# Altium PCB Audio_testboard.PcbDoc (part 6 of 6)
Units mm, origin at the board's own origin, x right, y up, seen from the top; angles counter-clockwise.
Board outline 220.73 x 144.32 mm, 4 copper layers (Top Layer, Mid-Layer 1, Mid-Layer 2, Bottom Layer), stack 1.894 mm thick; 462 components, 310 nets, 1757 pads, 740 vias.
Unrouted connection lines stored in the file: 5.
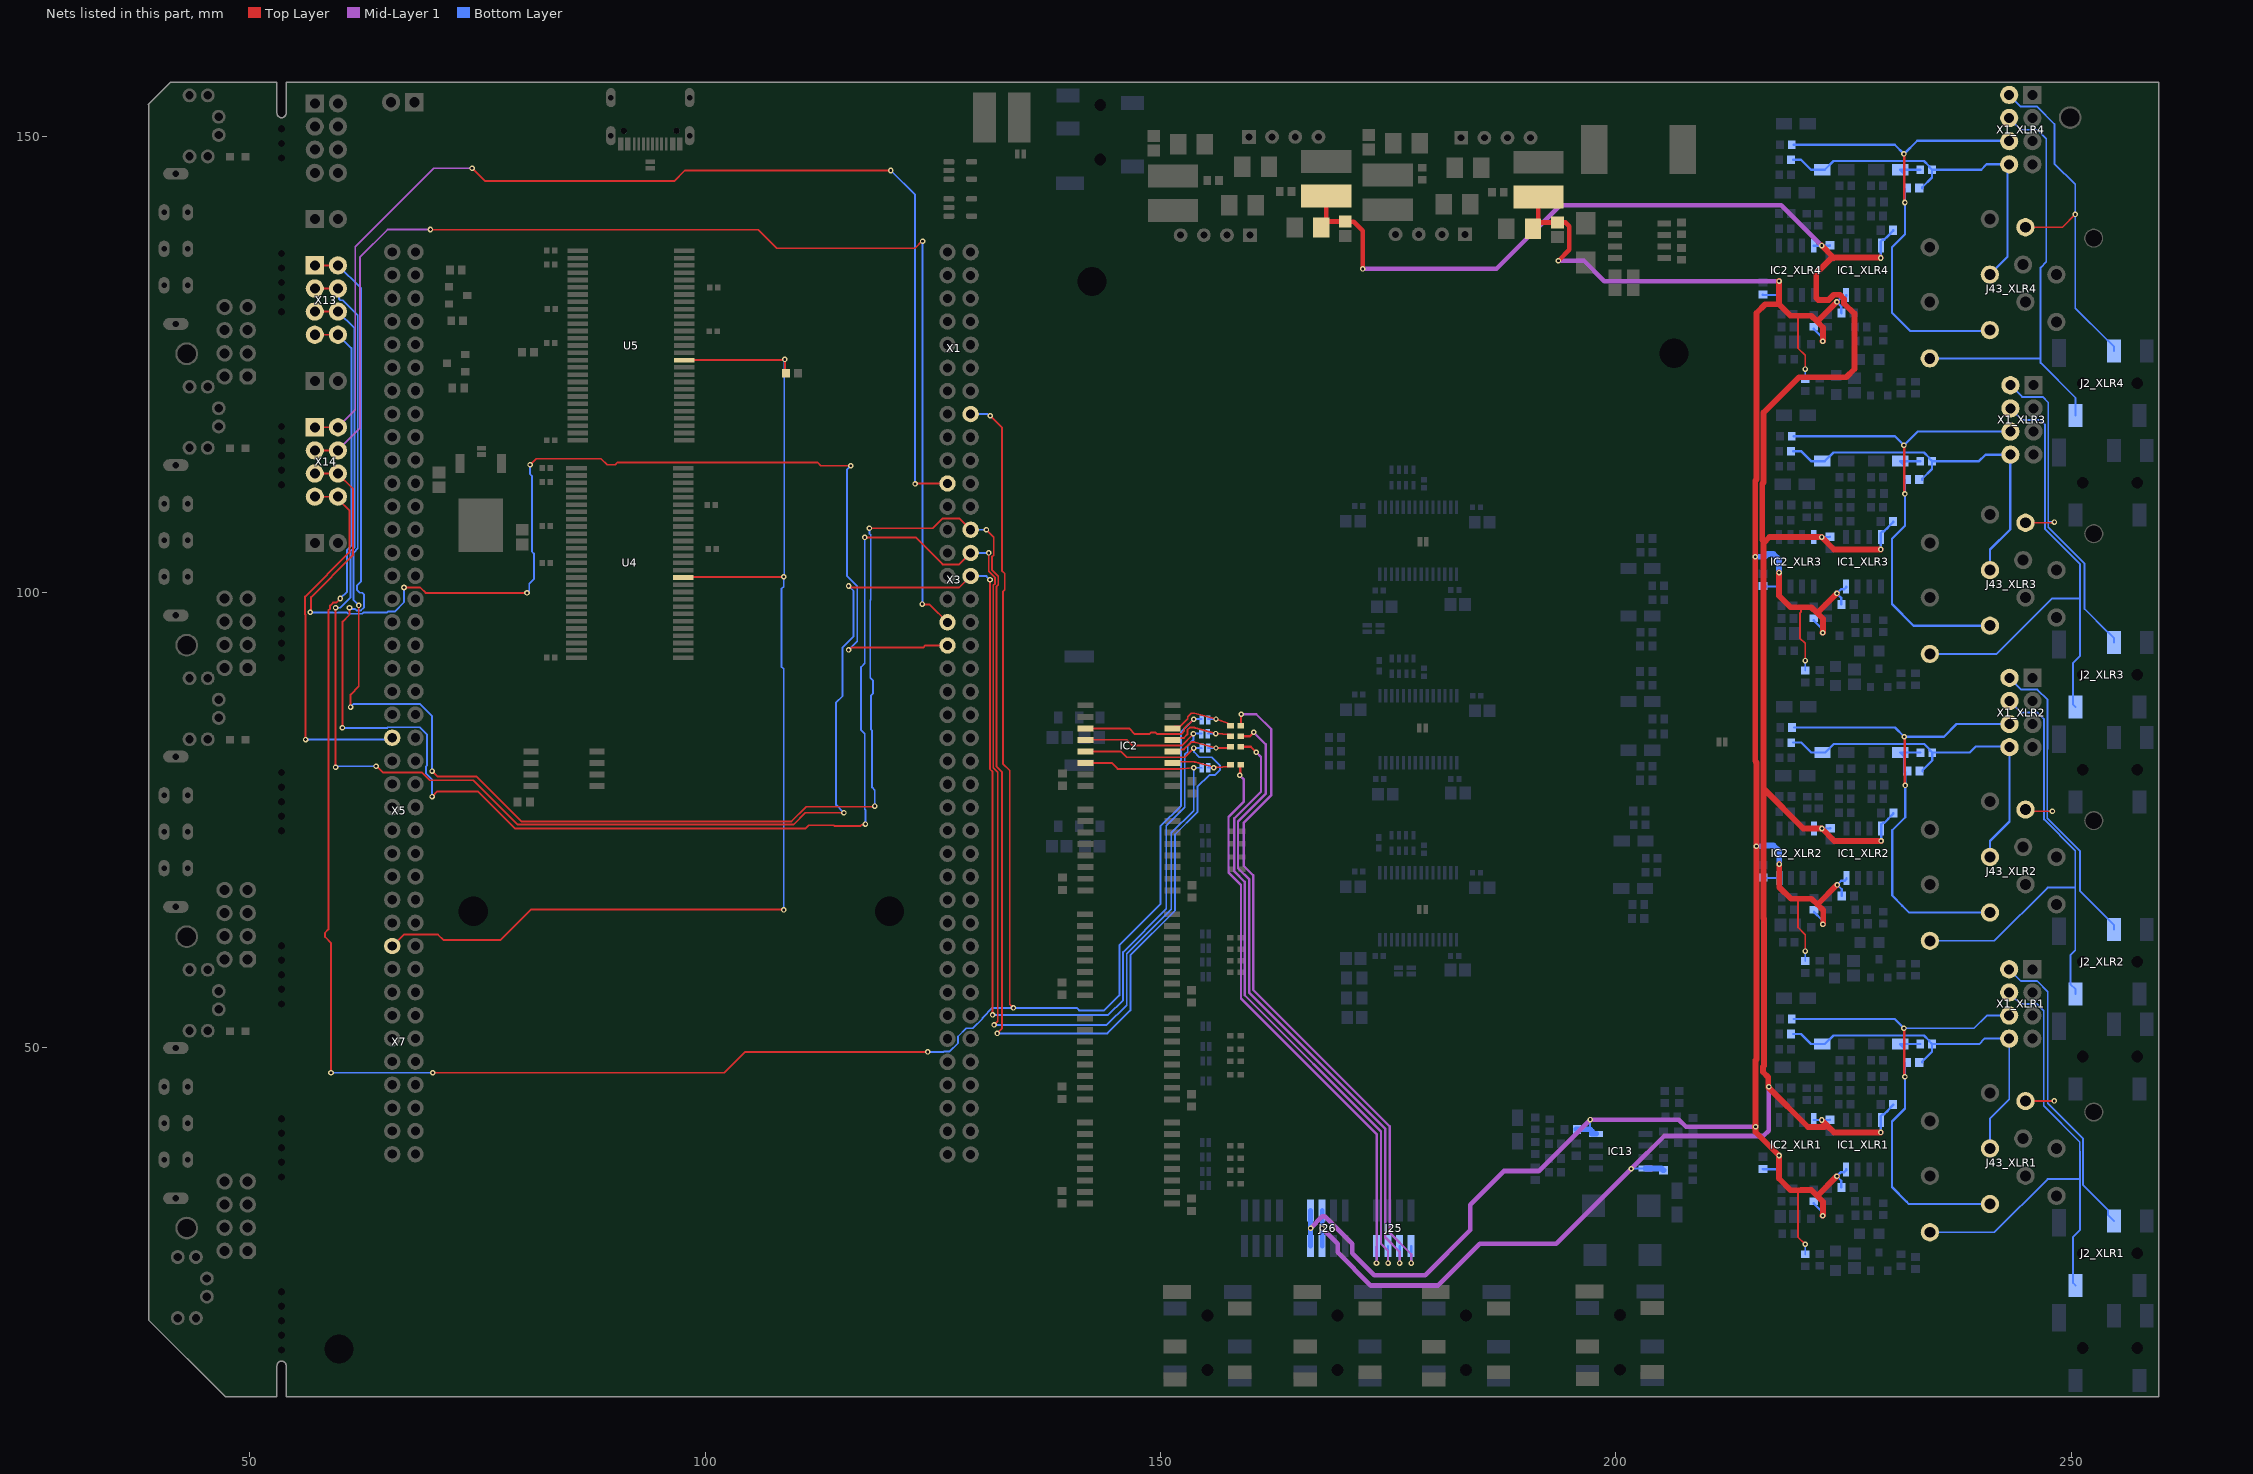
[diagram p7: the nets of this part, all layers, seen from the top]

## Via types
v1: diameter 0.61, hole 0.305, Top Layer to Bottom Layer, 321 vias
v2: diameter 0.6, hole 0.3, Top Layer to Bottom Layer, tented both sides, 219 vias
v3: diameter 0.61, hole 0.305, Top Layer to Bottom Layer, tented both sides, 190 vias
v4: diameter 1.27, hole 0.711, Top Layer to Bottom Layer, 8 vias
v5: diameter 0.6, hole 0.3, Top Layer to Bottom Layer, 2 vias

## Nets (pads, with @x,y where several pads share a name; then routed paths per layer and width w, separated by ;. In a path a pad name is that pad's centre, name@x,y a point inside that pad or via, vN(x,y) a via of type N, cw(c..) or ccw(c..) an arc to the next point about the centre after c; other vN are vias at no path point) (continued)
SPI2_MISO: IC2.6 J22.1 X3.8 X13.1 X13.2 | length 281.1
  Top Layer w0.203: X13.1@57.15,135.89 X13.2@59.69,135.89 ; v1(60.188,85.122) 60.198,85.132 60.198,96.774 60.96,97.536 v1(60.96,98.298) ; v3(70.034,77.567) 70.593,78.126 75.063,78.126 79.137,74.052 111.001,74.052 111.366,74.417 114.146,74.417 114.247,74.316 117.027,74.316 117.175,74.463 117.534,74.463 v3(117.612,74.541) ; v3(117.532,106.015) 123.12,106.015 126.075,103.06 127.904,103.06 X3.8@129.16,104.316 ; v1(131.142,104.316) 131.142,102.312 131.842,101.612 131.842,100.946 131.639,100.742 131.639,80.728 132.131,80.236 132.131,52.883 v1(131.736,52.488) ; IC2.6@141.786,81.242 141.805,81.261 144.636,81.261 145.298,80.599 150.332,80.599 150.335,80.602 152.088,80.602 152.105,80.602 v2(153.65,80.729)
  Bottom Layer w0.203: X13.2@59.69,135.89 62.23,133.35 62.23,101.195 61.767,100.732 61.767,100.269 62.094,99.942 62.364,99.942 62.535,99.771 62.535,98.321 62.207,97.993 61.745,97.993 61.592,98.146 61.112,98.146 v1(60.96,98.298) ; v1(60.188,85.122) 60.22,85.09 65.097,85.09 65.182,85.175 68.678,85.175 69.456,84.397 69.456,80.961 69.374,80.879 69.374,80.087 70.034,79.427 v3(70.034,77.567) ; v3(117.532,106.015) 117.532,92.197 117.126,91.791 117.126,84.851 117.532,84.445 117.532,76.195 117.612,76.116 v3(117.612,74.541) ; X3.8@129.16,104.316 v1(131.142,104.316) ; v1(131.736,52.488) 144.108,52.488 146.297,54.677 146.297,60.319 151.189,65.212 151.189,73.57 153.65,76.031 v2(153.65,80.729) ; v2@153.655,80.734 153.66,80.729 154.52,80.729 J22.1@154.525,80.734
SPI2_MISO_: J25.7 R20.2 | length 64.2
  Top Layer w0.254: v1(158.718,79.915) 158.77,79.968 158.77,80.996 R20.2@158.823,81.049
  Mid-Layer 1 w0.254: v1(158.718,79.915) 159.131,79.502 159.131,76.962 157.48,75.311 157.48,69.215 158.852,67.843 158.852,55.397 173.736,40.513 173.736,26.359 v1(173.719,26.342)
  Bottom Layer w0.254: v1(173.719,26.342) J25.7@173.719,28.212
SPI2_MISO_i: IC2.11 J22.2 R20.1 | length 7.3
  Top Layer w0.203: IC2.11@151.336,81.242 152.109,81.385 153.65,81.385 cw(c153.65,80.729) 153.825,81.361 v2@155.878,80.791 ; v2(155.864,80.739) 155.878,80.753 v2@155.878,80.791 ; R20.1@157.748,81.049 157.6,80.851 156.1,80.739 156.092,80.739 cw(c156.092,80.942) 156.038,80.746 v2@155.878,80.791
  Bottom Layer w0.203: J22.2@155.225,80.734 155.23,80.739 v2(155.864,80.739)
SPI2_MOSI: IC2.5 J21.1 X3.6 X13.3 X13.4 | length 283.3
  Top Layer w0.203: X13.3@57.15,133.35 X13.4@59.69,133.35 ; v1(61.078,87.384) 61.078,88.764 61.976,89.662 v1(61.976,98.552) ; v3(70.034,80.361) 70.63,79.765 74.921,79.765 79.842,74.844 109.491,74.844 111.096,76.449 118.565,76.449 v3(118.635,76.52) ; v3(118.04,107.031) 125.019,107.031 126.1,108.111 127.904,108.111 X3.6@129.16,106.856 ; v1(130.888,106.856) 131.701,106.043 131.701,104.084 131.498,103.881 131.498,102.459 132.198,101.759 132.198,100.798 131.994,100.595 131.994,80.876 132.588,80.282 132.588,52.07 v1(132.08,51.562) ; IC2.5@141.786,82.512 141.805,82.531 145.652,82.531 146.301,81.882 152.644,81.882 v2(153.65,82.888)
  Bottom Layer w0.203: X13.4@59.69,133.35 59.824,133.216 59.824,132.2 59.96,132.064 60.209,132.064 61.874,130.399 61.874,104.815 61.411,104.352 61.411,99.117 v1(61.976,98.552) ; v1(61.078,87.384) 61.434,87.74 68.653,87.74 70.034,86.359 v3(70.034,80.361) ; v3(118.04,107.031) 118.04,106.441 118.192,106.289 118.192,99.182 118.142,99.132 118.142,90.609 118.446,90.305 118.446,88.888 118.231,88.673 118.231,84.895 118.345,84.781 118.345,78.563 118.635,78.273 v3(118.635,76.52) ; X3.6@129.16,106.856 v1(130.888,106.856) ; v1(132.08,51.562) 144.182,51.562 146.703,54.083 146.703,60.151 151.596,65.043 151.596,73.402 154.056,75.863 154.056,78.635 155.351,79.929 155.981,79.929 156.52,80.467 156.52,81.011 155.646,81.884 154.271,81.884 153.683,82.472 153.683,82.855 v2(153.65,82.888) ; v2@153.655,82.893 153.66,82.888 154.52,82.888 J21.1@154.525,82.893
SPI2_MOSI_: J25.5 R19.2 | length 68.3
  Top Layer w0.254: R19.2@158.823,83.039 159.912,83.039 v1(160.528,82.423)
  Mid-Layer 1 w0.254: v1(160.528,82.423) 161.036,81.915 161.036,78.105 158.115,75.184 158.115,69.342 159.258,68.199 159.258,55.753 174.219,40.792 174.219,28.473 174.989,27.703 v1(174.989,26.342)
  Bottom Layer w0.254: v1(174.989,26.342) J25.5@174.989,28.212
SPI2_MOSI_i: IC2.12 J21.2 R19.1 | length 6.8
  Top Layer w0.203: 152.292,82.747 152.582,82.747 153.374,83.539 153.57,83.539 cw(c153.65,82.888) 153.825,83.52 156.046,82.905 ccw(c156.1,83.101) v2(156.1,82.898) 157.6,82.898 R19.1@157.748,83.039
  Bottom Layer w0.203: J21.2@155.225,82.893 v2@156.095,82.893
SPI2_NSS: IC2.3 J20.1 X1.16 X13.7 X13.8 | length 293
  Top Layer w0.203: X13.7@57.15,128.27 X13.8@59.69,128.27 ; v1(58.928,47.244) 58.928,61.5 58.273,62.155 58.273,62.618 58.643,62.988 58.643,98.013 58.826,98.196 58.826,98.529 59.154,98.857 59.487,98.857 v1(59.944,99.314) ; v1(70.104,47.244) 102.108,47.244 104.394,49.53 v1(124.46,49.53) ; v1(131.318,119.38) 132.588,118.11 132.588,102.375 132.909,102.054 132.909,100.278 132.706,100.074 132.706,81.17 133.452,80.424 133.452,54.762 v1(133.858,54.356) ; IC2.3@141.786,85.052 146.56,85.052 147.19,84.422 148.785,84.422 148.977,84.614 149.439,84.614 149.631,84.422 152.265,84.422 152.61,84.767 152.61,85.041 153.632,86.063 v2(153.65,86.063)
  Bottom Layer w0.203: v1(58.928,47.244) 58.981,47.297 59.129,47.297 59.182,47.244 v1(70.104,47.244) ; X13.8@59.69,128.27 61.163,126.797 61.163,105.11 60.7,104.647 60.7,100.07 v1(59.944,99.314) ; v1(124.46,49.53) 126.178,49.53 126.238,49.59 126.866,49.59 127.774,50.498 127.774,51.222 128.682,52.13 129.406,52.13 130.475,53.199 130.475,53.287 131.544,54.356 v1(133.858,54.356) 140.788,54.356 141.062,54.081 143.825,54.081 145.484,55.74 145.484,61.243 149.991,65.749 149.991,74.283 152.266,76.558 152.266,84.679 v2(153.65,86.063) ; X1.16@129.25,119.466 X1.16@129.16,119.556 131.032,119.556 131.208,119.38 v1(131.318,119.38) ; v2@153.655,86.068 J20.1@154.525,86.068
SPI2_NSS_: J25.1 R10.2 | length 74.6
  Top Layer w0.254: R10.2@158.823,85.349 158.85,85.376 158.85,86.587 v1(158.877,86.614)
  Mid-Layer 1 w0.254: v1(158.877,86.614) 160.528,86.614 162.179,84.963 162.179,77.724 159.131,74.676 159.131,69.977 160.172,68.936 160.172,56.363 175.158,41.377 175.158,29.693 177.529,27.322 v1(177.529,26.342)
  Bottom Layer w0.254: v1(177.529,26.342) J25.1@177.529,28.212
SPI2_NSS_i: IC2.14 J20.2 R10.1 | length 8.4
  Top Layer w0.203: IC2.14@151.336,85.052 151.559,85.275 152.164,85.275 152.994,86.106 152.994,86.335 153.378,86.719 153.738,86.719 v2(156.1,86.073) 157.6,85.547 R10.1@157.748,85.349
  Bottom Layer w0.203: J20.2@155.225,86.068 156.095,86.068 v2(156.1,86.073)
SPI2_SCK: IC2.4 J23.1 X3.10 X13.5 X13.6 | length 264.7
  Top Layer w0.203: X13.5@57.15,130.81 X13.6@59.69,130.81 ; v1(59.436,80.772) v1(59.436,98.298) ; v1(63.875,80.898) 63.975,80.898 64.677,80.196 68.929,80.196 69.767,79.358 74.566,79.358 79.435,74.489 109.71,74.489 111.01,75.789 v3(115.246,75.789) ; 116.025,100.52 127.904,100.52 X3.10@129.16,101.776 ; v1(131.283,101.381) 131.283,80.581 131.572,80.292 v1(131.572,53.594) ; IC2.4@141.786,83.782 141.805,83.801 146.287,83.801 146.936,83.152 152.253,83.152 152.254,83.153 152.338,83.153 153.621,84.436 v2(153.621,84.476)
  Bottom Layer w0.203: v1(59.436,80.772) 59.514,80.85 59.695,80.85 59.743,80.898 v1(63.875,80.898) ; v1(59.436,98.298) 59.944,98.298 61.056,99.41 61.056,104.5 61.519,104.962 61.519,128.981 X13.6@59.69,130.81 ; v3(115.246,75.789) 114.382,76.653 114.382,87.895 115.094,88.607 115.094,93.944 116.303,95.153 116.303,100.132 v3(115.754,100.681) ; X3.10@129.16,101.776 130.888,101.776 v1(131.283,101.381) v1@131.318,101.346 ; v1(131.572,53.594) 144.272,53.594 145.891,55.213 145.891,60.488 150.632,65.23 150.632,74.35 152.672,76.39 152.672,82.202 152.689,82.202 152.994,82.507 152.994,83.16 153.621,83.786 v2(153.621,84.476) ; v2@153.626,84.481 J23.1@154.496,84.481
SPI2_SCK_: J25.3 R14.2 | length 70.9
  Top Layer w0.254: R14.2@158.823,84.194 159.822,84.194 v1(160.242,84.614)
  Mid-Layer 1 w0.254: v1(160.242,84.614) 161.544,83.312 161.544,77.851 158.521,74.828 158.521,69.698 159.766,68.453 159.766,56.007 174.694,41.079 174.694,29.141 176.259,27.576 v1(176.259,26.342)
  Bottom Layer w0.254: v1(176.259,26.342) J25.3@176.259,28.212
SPI2_SCK_i: IC2.13 J23.2 R14.1 | length 8.4
  Top Layer w0.203: IC2.13@151.336,83.782 151.559,84.005 152.585,84.005 152.965,84.385 152.965,84.893 153.216,85.144 153.759,85.144 153.762,85.141 153.795,85.108 153.84,85.096 156.029,84.493 ccw(c156.083,84.689) v2(156.071,84.486) 157.6,84.392 R14.1@157.748,84.194
  Bottom Layer w0.203: J23.2@155.196,84.481 156.066,84.481 v2(156.071,84.486)
TRS_RING_XLR1: J2_XLR1.5 J43_XLR1.5 X1_XLR1.2 | length 37.3
  Top Layer w0.203: J43_XLR1.5@244.976,44.126 248.1,44.126 v1(248.126,44.153)
  Bottom Layer w0.203: X1_XLR1.2@243.189,58.603 244.475,57.317 246.248,57.317 247.426,56.14 247.426,44.196 ; v1(248.126,44.153) 247.469,44.153 247.426,44.196 ; J2_XLR1.5@254.684,30.982 254.024,31.642 254.024,32.181 251.308,34.897 251.308,39.993 247.426,43.875 247.426,44.196
TRS_RING_XLR2: J2_XLR2.5 J43_XLR2.5 X1_XLR2.2 | length 37.2
  Top Layer w0.203: J43_XLR2.5@244.976,76.13 245.16,75.946 v1(247.929,75.946) v1@248.158,75.946
  Bottom Layer w0.203: X1_XLR2.2@243.221,90.603 244.507,89.317 246.28,89.317 247.396,88.201 247.396,82.804 247.371,82.779 247.371,75.946 ; v1(247.929,75.946) 247.371,75.946 ; J2_XLR2.5@254.684,62.986 254.684,63.494 254.024,64.154 254.016,64.154 250.952,67.219 250.952,71.623 247.371,75.204 247.371,75.946
TRS_RING_XLR3: J2_XLR3.5 J43_XLR3.5 X1_XLR3.2 | length 38.2
  Top Layer w0.203: J43_XLR3.5@244.976,107.626 248.088,107.626 v1(248.158,107.696)
  Bottom Layer w0.203: X1_XLR3.2@243.316,122.726 244.602,121.44 246.86,121.44 247.47,120.83 247.47,107.696 ; v1(248.158,107.696) 247.47,107.696 ; J2_XLR3.5@254.684,94.482 254.684,94.99 254.024,95.65 253.97,95.65 251.46,98.16 251.46,103.124 247.47,107.114 247.47,107.696
TRS_RING_XLR4: J2_XLR4.5 J43_XLR4.5 X1_XLR4.2 | length 40
  Top Layer w0.203: J43_XLR4.5@244.961,140.074 249.04,140.074 v1(250.444,141.478)
  Bottom Layer w0.203: X1_XLR4.2@243.189,154.603 244.475,153.317 246.248,153.317 248.158,151.407 248.158,147.066 250.444,144.78 v1(250.444,141.478) 250.444,131.189 253.979,127.654 254.024,127.654 254.684,126.994 J2_XLR4.5@254.684,126.486
TRS_TIP_XLR1: J2_XLR1.2 J43_XLR1.6 X1_XLR1.4 | length 55.8
  Bottom Layer w0.203: J43_XLR1.6@234.476,29.726 241.562,29.726 247.396,35.56 250.952,35.56 ; X1_XLR1.4@243.189,56.063 244.475,54.777 246.248,54.777 246.983,54.042 246.983,43.593 250.938,39.638 250.938,38.627 250.952,38.613 250.952,35.56 ; J2_XLR1.2@250.484,23.882 250.208,24.158 250.208,29.228 250.952,29.972 250.952,35.56
TRS_TIP_XLR2: J2_XLR2.2 J43_XLR2.6 X1_XLR2.4 | length 55.1
  Bottom Layer w0.203: J43_XLR2.6@234.476,61.73 241.562,61.73 247.396,67.564 250.444,67.564 ; X1_XLR2.4@243.221,88.063 244.507,86.777 246.28,86.777 247.015,86.042 247.015,75.057 250.444,71.628 250.444,67.564 ; J2_XLR2.2@250.484,55.886 250.484,56.394 249.904,56.974 249.904,60.166 250.444,60.706 250.444,67.564
TRS_TIP_XLR3: J2_XLR3.2 J43_XLR3.6 X1_XLR3.4 | length 56.6
  Bottom Layer w0.203: J43_XLR3.6@234.476,93.226 241.816,93.226 247.904,99.314 250.952,99.314 ; X1_XLR3.4@243.316,120.186 244.602,118.9 246.658,118.9 247.114,118.444 247.114,106.962 250.952,103.124 250.952,99.314 ; J2_XLR3.2@250.484,87.382 250.19,87.676 250.19,92.202 250.952,92.964 250.952,99.314
TRS_TIP_XLR4: J2_XLR4.2 J43_XLR4.6 X1_XLR4.4 | length 49.5
  Bottom Layer w0.203: J43_XLR4.6@234.461,125.674 246.578,125.674 246.634,125.73 ; X1_XLR4.4@243.189,152.063 244.475,150.777 246.248,150.777 247.259,149.766 247.259,136.261 246.634,135.636 246.634,125.73 ; J2_XLR4.2@250.484,119.386 250.484,121.325 246.634,125.175 246.634,125.73
"UART1 RX": X3.13 X14.3 X14.4 | length 132.4
  Top Layer w0.203: X14.3@57.15,115.57 X14.4@59.69,115.57 ; v1@69.85,139.797 105.848,139.797 107.88,137.765 123.052,137.765 123.814,138.527 v3(123.882,138.527) ; v3(123.837,98.694) 123.882,98.649 124.667,98.649 X3.13@126.62,96.696
  Mid-Layer 1 w0.203: X14.4@59.69,115.57 62.103,117.983 62.103,136.779 65.151,139.827 v1(69.85,139.827)
  Bottom Layer w0.203: v3(123.837,98.694) 123.86,98.716 123.86,138.505 v3(123.882,138.527)
UART1_TX: X3.1 X14.1 X14.2 | length 125.7
  Top Layer w0.203: X14.1@57.15,118.11 X14.2@59.69,118.11 ; v1(74.422,146.558) 75.819,145.161 89.027,145.161 89.052,145.136 96.622,145.136 97.79,146.304 v1(120.396,146.304) ; v1@123.112,111.936 X3.1@126.62,111.936
  Mid-Layer 1 w0.203: X14.2@59.69,118.11 61.595,120.015 61.595,137.922 70.231,146.558 v1(74.422,146.558) ; v1(123.063,111.887) v1@123.112,111.936
  Bottom Layer w0.203: v1(120.396,146.304) 123.063,143.637 v1(123.063,111.887)
UART2_RX: X5.3 X14.7 X14.8 | length 41.4
  Top Layer w0.203: v1(56.134,83.82) 56.134,97.508 56.083,97.559 56.083,99.517 60.944,104.378 60.944,108.982 59.69,110.236 X14.8@59.69,110.49 X14.7@57.15,110.49
  Bottom Layer w0.203: v1(56.134,83.82) 65.459,83.82 X5.3@65.66,84.021
UART2_TX: X3.15 X14.5 X14.6 | length 129.5
  Top Layer w0.203: v1@56.744,97.79 56.744,99.459 61.332,104.048 61.332,111.388 X14.6@59.69,113.03 X14.5@57.15,113.03 ; v1(66.944,100.516) 68.72,100.516 69.318,99.919 v3(80.448,99.919) ; v3(80.789,113.991) 80.804,113.991 81.464,114.651 88.576,114.651 89.236,113.991 90.12,113.991 90.374,114.245 112.35,114.245 112.706,113.889 v3(116.008,113.889) ; v3(115.754,93.671) 115.822,93.671 116.076,93.925 123.968,93.925 124.2,94.156 X3.15@126.62,94.156
  Bottom Layer w0.203: v1(56.642,97.79) 59.103,97.79 59.154,97.739 59.667,97.739 59.718,97.79 60.678,97.79 60.83,97.638 62.355,97.638 62.507,97.79 65.097,97.79 65.182,97.875 65.906,97.875 66.944,98.913 v1(66.944,100.516) ; v3(80.448,99.919) 80.448,99.987 80.702,100.241 80.702,100.935 81.21,101.443 81.21,104.237 80.999,104.448 80.999,112.747 80.789,112.958 v3(80.789,113.991) ; v3(115.754,93.671) 116.709,94.626 116.709,100.66 115.602,101.767 115.602,113.483 v3(116.008,113.889)
UDQM: R44.2 U4.39 U5.39 X7.1 | length 129.6
  Top Layer w0.203: X7.1@65.66,61.161 66.916,62.416 70.68,62.416 71.27,61.826 77.574,61.826 80.929,65.181 108.582,65.181 v3(108.642,65.121) ; U4.39@97.601,101.621 97.639,101.659 108.604,101.659 v3(108.642,101.697) ; U5.39@97.72,125.483 108.685,125.483 v3(108.761,125.559) 108.761,124.184 R44.2@108.896,124.049
  Bottom Layer w0.203: v3(108.642,65.121) 108.642,91.576 108.388,91.83 108.388,100.361 108.642,100.615 v3(108.642,101.697) 108.701,101.756 108.701,125.499 v3(108.761,125.559)
VCC+: C8_XLR1.1 C8_XLR2.1 C8_XLR3.1 C8_XLR4.1 C9_XLR1.1 C9_XLR2.1 C9_XLR3.1 C9_XLR4.1 C75.1 C76.2 C89.1 IC1_XLR1.8 IC1_XLR2.8 IC1_XLR3.8 IC1_XLR4.8 IC2_XLR1.8 IC2_XLR2.8 IC2_XLR3.8 IC2_XLR4.8 IC13.8 J26.7 J26.8 L4.1 R17_XLR1.1 R17_XLR2.1 R17_XLR3.1 R17_XLR4.1 R63_XLR1.2 R63_XLR2.2 R63_XLR3.2 R63_XLR4.2 | length 324.2
  Top Layer w0.203: 220,34.346 220,29.2 v1(220.8,28.4) ; 220,66.346 220,63.206 220.8,62.406 v1(220.8,60.6) ; 220,130.346 220,126.8 220.8,126 v1(220.8,124.5) ; 220.318,98.346 220.318,97.815 220.215,97.712 220.215,94.959 220.8,94.374 v1(220.8,92.5)
  Top Layer w0.508: C75.1@190.9,139.9 190.9,139.954 C75.1@191.5,140.554 ; L4.1@191.5,143.39 C75.1@191.5,140.554 ; v1(193.7,136.4) 194.9,137.6 194.9,140.2 194.513,140.587 193.613,140.587 C76.2@193.6,140.6 191.546,140.6 C75.1@191.5,140.554
  Top Layer w0.635: v1(217.916,102.156) 217.916,99.616 219.186,98.346 220.318,98.346 220.329,98.357 221.461,98.357 222.102,97.716 ; v1(217.916,134.156) 217.916,131.616 ; v1(217.948,70.156) 217.948,67.616 219.218,66.346 220,66.346 220.35,66.346 220.361,66.357 221.493,66.357 222.134,65.716 ; v1(222.704,31.551) 222.742,31.588 222.742,33.076 222.102,33.716 ; v1(222.704,95.551) 222.742,95.588 222.742,97.076 222.102,97.716 ; v1(222.704,127.551) 222.742,127.588 222.742,129.076 222.102,129.716 ; v1(222.736,63.551) 222.774,63.588 222.774,65.076 222.134,65.716 ; v1(224.266,35.87) 224.255,35.87 222.102,33.716 ; v1(224.266,99.87) 224.255,99.87 222.102,97.716 ; v1(224.266,131.87) 224.255,131.87 222.102,129.716 ; v1(224.298,67.87) 224.287,67.87 222.134,65.716 ; 217.916,131.616 216.392,131.616 215.438,130.662 215.438,112.383 215.297,112.242 v1(215.297,103.9) 215.297,81.455 215.438,81.313 v1(215.438,72.1) 215.438,48.701 215.34,48.602 215.34,40.732 v1(217.916,38.156) 217.916,35.616 219.186,34.346 220,34.346 220.318,34.346 220.329,34.357 221.461,34.357 222.102,33.716 ; 217.916,131.616 219.186,130.346 220,130.346 220.318,130.346 220.329,130.357 221.461,130.357 222.102,129.716
  Mid-Layer 1 w0.508: v1(166.48,30.162) 167.782,31.464 168.053,31.464 171.069,28.448 171.069,27.432 173.482,25.019 179.07,25.019 184.023,29.972 184.023,32.766 187.706,36.449 191.549,36.449 v1(197.2,42.1) 206.9,42.1 207.7,41.3 215.325,41.3 v1(215.34,41.315) ; v1(193.7,136.4) 196.5,136.4 198.744,134.156 v1(217.916,134.156)
  Bottom Layer w0.203: R63_XLR1.2@220.8,27.3 v1(220.8,28.4) ; R63_XLR2.2@220.8,59.5 v1(220.8,60.6) ; R63_XLR3.2@220.8,91.4 v1(220.8,92.5) ; R63_XLR4.2@220.8,123.4 v1(220.8,124.5)
  Bottom Layer w0.254: 197.162,41.027 197.162,42.062 v1(197.2,42.1) ; C9_XLR1.1@216.138,36.677 216.183,36.632 IC2_XLR1.8@217.916,36.632 v1(217.916,38.156) ; C9_XLR3.1@216.138,100.677 216.183,100.632 IC2_XLR3.8@217.916,100.632 v1(217.916,102.156) ; C9_XLR4.1@216.138,132.677 216.183,132.632 IC2_XLR4.8@217.916,132.632 v1(217.916,134.156) ; C9_XLR2.1@216.17,68.677 216.215,68.632 IC2_XLR2.8@217.948,68.632 v1(217.948,70.156) ; R17_XLR1.1@221.726,32.945 221.726,32.895 222.636,31.985 222.636,31.619 v1(222.704,31.551) ; R17_XLR3.1@221.726,96.945 221.726,96.895 222.636,95.985 222.636,95.619 v1(222.704,95.551) ; R17_XLR4.1@221.726,128.945 221.726,128.895 222.636,127.985 222.636,127.619 v1(222.704,127.551) ; R17_XLR2.1@221.758,64.945 221.758,64.895 222.668,63.985 222.668,63.619 v1(222.736,63.551) ; C8_XLR1.1@224.774,34.645 224.759,34.66 224.759,35.377 v1(224.266,35.87) 224.725,36.329 225.084,36.329 225.282,36.527 IC1_XLR1.8@225.282,36.632 ; C8_XLR3.1@224.774,98.645 224.759,98.66 224.759,99.377 v1(224.266,99.87) 224.725,100.329 225.084,100.329 225.282,100.527 IC1_XLR3.8@225.282,100.632 ; C8_XLR4.1@224.774,130.645 224.759,130.66 224.759,131.377 v1(224.266,131.87) 224.725,132.329 225.084,132.329 225.282,132.527 IC1_XLR4.8@225.282,132.632 ; C8_XLR2.1@224.806,66.645 224.791,66.66 224.791,67.377 v1(224.298,67.87) 224.757,68.329 225.116,68.329 225.314,68.527 IC1_XLR2.8@225.314,68.632
  Bottom Layer w0.508: J26.7@166.48,28.212 v1(166.48,30.162) J26.8@166.48,32.112
  Bottom Layer w0.635: C89.1@195.65,41.027 C89.1@195.725,41.027 197.162,41.027 197.393,40.797 197.393,40.54 197.4,40.532 IC13.8@197.838,40.532 ; v1(215.297,103.9) 216.379,103.9 216.68,104.201 217.321,104.201 217.7,103.822 217.7,103.8 217.916,103.584 v1(217.916,102.156) ; v1(215.438,72.1) 216.33,72.1 216.43,72.201 217.321,72.201 217.948,71.575 v1@217.948,70.156
VCC-: C10_XLR1.2 C10_XLR2.2 C10_XLR3.2 C10_XLR4.2 C11_XLR1.2 C11_XLR2.2 C11_XLR3.2 C11_XLR4.2 C78.1 C79.2 C90.2 IC1_XLR1.4 IC1_XLR2.4 IC1_XLR3.4 IC1_XLR4.4 IC2_XLR1.4 IC2_XLR2.4 IC2_XLR3.4 IC2_XLR4.4 IC13.4 J26.5 J26.6 L6.1 | length 315.8
  Top Layer w0.508: C78.1@167.719,140.173 C78.1@168.246,140.7 ; L6.1@168.2,143.49 168.2,140.654 C78.1@168.246,140.7 ; v1(172.2,135.5) 172.2,139.7 171.213,140.687 170.313,140.687 C79.2@170.3,140.7 C78.1@168.246,140.7
  Top Layer w0.635: v1@216.735,45.7 216.735,46.736 216.154,47.317 216.154,47.908 216.254,48.008 216.254,64.162 216.226,64.19 216.226,78.414 ; v1@216.741,45.641 221.101,41.281 222.918,41.281 223.013,41.376 223.278,41.376 ; v1(222.598,42.056) 223.278,41.376 ; v1(222.597,138.056) 223.958,136.696 ; 223.815,136.839 222,135.024 222,132.331 222.231,132.1 223.372,132.1 223.929,132.657 224.592,132.657 225.053,132.196 225.053,131.709 226.162,130.6 226.2,130.6 226.2,124.5 225.3,123.6 220.1,123.6 216.226,119.726 216.226,112.057 216.084,111.916 216.084,105.73 216.226,105.588 216.226,105.41 ; 223.913,136.741 v1@229.047,136.741 ; v1(229.092,40.696) 223.958,40.696 223.278,41.376 ; v1(229.092,104.696) 223.958,104.696 v1(222.597,106.056) 216.872,106.056 216.226,105.41 ; v1(229.124,72.696) 223.99,72.696 v1(222.63,74.056) 220.584,74.056 216.226,78.414 ; 216.226,78.414 216.226,105.41
  Mid-Layer 1 w0.508: v1(167.75,30.162) 169.464,28.448 169.464,27.513 173.101,23.876 180.467,23.876 185.039,28.448 193.448,28.448 v1(201.7,36.7) 205.3,40.3 216.2,40.3 216.796,40.896 v1@216.796,45.696 ; v1(172.2,135.5) 186.9,135.5 193.9,142.5 218.153,142.5 v1(222.597,138.056)
  Bottom Layer w0.254: v1(201.7,36.7) 201.722,36.722 IC13.4@203.262,36.722 ; IC2_XLR1.4@221.726,42.056 v1(222.598,42.056) 223.469,42.056 C11_XLR1.2@223.504,42.091 ; IC2_XLR3.4@221.726,106.056 v1(222.597,106.056) 223.469,106.056 C11_XLR3.2@223.504,106.091 ; IC2_XLR4.4@221.726,138.056 v1(222.597,138.056) 223.469,138.056 C11_XLR4.2@223.504,138.091 ; IC2_XLR2.4@221.758,74.056 v1(222.63,74.056) 223.501,74.056 C11_XLR2.2@223.536,74.091 ; v1(229.092,40.696) 229.092,42.494 229.29,42.692 229.456,42.692 229.872,43.107 229.872,43.124 230.442,43.694 C10_XLR1.2@230.442,43.744 ; v1(229.092,104.696) IC1_XLR3.4@229.092,106.056 229.092,106.494 229.29,106.692 229.456,106.692 229.872,107.107 229.872,107.124 230.442,107.694 C10_XLR3.2@230.442,107.744 ; v1(229.092,136.696) IC1_XLR4.4@229.092,138.056 229.092,138.493 229.29,138.692 229.456,138.692 229.872,139.107 229.872,139.124 230.442,139.694 C10_XLR4.2@230.442,139.744 ; v1(229.124,72.696) IC1_XLR2.4@229.124,74.056 229.124,74.494 229.322,74.692 229.488,74.692 229.904,75.107 229.904,75.124 230.474,75.694 C10_XLR2.2@230.474,75.744
  Bottom Layer w0.508: J26.5@167.75,28.212 v1(167.75,30.162) J26.6@167.75,32.112
  Bottom Layer w0.635: IC13.4@203.262,36.722 205.005,36.722 205.2,36.527 C90.2@205.25,36.527
  other v1: 216.8,45.7
XLR_A_XLR1: C1_XLR1.2 C2_XLR1.2 J43_XLR1.2 R4_XLR1.1 R14_XLR1.1 X1_XLR1.6 | length 60.3
  Top Layer w0.254: v1(231.632,52.126) 231.673,52.085 231.673,46.857 v1(231.738,46.792)
  Bottom Layer w0.203: v1(231.632,52.126) 239.324,52.126 240.721,53.523 X1_XLR1.6@243.189,53.523 ; 231.943,33.061 232.179,32.826 J43_XLR1.2@241.076,32.826
  Bottom Layer w0.254: R14_XLR1.1@219.518,53.142 230.616,53.142 v1(231.632,52.126) ; 231.943,33.061 230.31,34.694 230.31,41.876 231.738,43.304 v1(231.738,46.792) 231.738,48.255 231.632,48.361 231.632,49.965 C1_XLR1.2@231.204,50.393 R4_XLR1.1@233.41,50.393
XLR_A_XLR2: C1_XLR2.2 C2_XLR2.2 J43_XLR2.2 R4_XLR2.1 R14_XLR2.1 X1_XLR2.6 | length 60.3
  Top Layer w0.254: v1(231.664,84.126) 231.705,84.085 231.705,78.857 v1(231.77,78.792)
  Bottom Layer w0.203: 231.449,65.587 232.207,64.83 J43_XLR2.2@241.076,64.83
  Bottom Layer w0.254: R14_XLR2.1@219.55,85.142 230.648,85.142 v1(231.664,84.126) 236.018,84.126 237.415,85.523 X1_XLR2.6@243.221,85.523 ; 231.449,65.587 230.342,66.694 230.342,73.876 231.77,75.304 v1(231.77,78.792) 231.77,80.255 231.664,80.361 231.664,81.965 C1_XLR2.2@231.236,82.393 R4_XLR2.1@233.442,82.393
XLR_A_XLR3: C1_XLR3.2 C2_XLR3.2 J43_XLR3.2 R4_XLR3.1 R14_XLR3.1 X1_XLR3.6 | length 60.7
  Top Layer w0.254: v1(231.632,116.126) 231.673,116.085 231.673,110.857 v1(231.738,110.792)
  Bottom Layer w0.254: R14_XLR3.1@219.518,117.142 230.616,117.142 v1(231.632,116.126) 233.152,117.646 X1_XLR3.6@243.316,117.646 ; R4_XLR3.1@233.41,114.393 C1_XLR3.2@231.204,114.393 231.632,113.965 231.632,112.361 231.738,112.255 v1(231.738,110.792) 231.738,107.304 230.31,105.876 230.31,98.694 232.679,96.326 J43_XLR3.2@241.076,96.326
XLR_A_XLR4: C1_XLR4.2 C2_XLR4.2 J43_XLR4.2 R4_XLR4.1 R14_XLR4.1 X1_XLR4.6 | length 60.4
  Top Layer w0.254: v1(231.632,148.126) 231.673,148.085 231.673,142.857 v1(231.738,142.792)
  Bottom Layer w0.254: R14_XLR4.1@219.518,149.142 230.616,149.142 v1(231.632,148.126) 233.081,149.575 243.137,149.575 X1_XLR4.6@243.189,149.523 ; R4_XLR4.1@233.41,146.393 C1_XLR4.2@231.204,146.393 231.632,145.965 231.632,144.361 231.738,144.255 v1(231.738,142.792) 231.738,139.304 230.31,137.876 230.31,130.694 232.32,128.685 240.972,128.685 J43_XLR4.2@241.061,128.774
XLR_B_XLR1: C2_XLR1.1 C7_XLR1.2 J43_XLR1.3 R4_XLR1.2 R15_XLR1.1 X1_XLR1.8 | length 40.7
  Bottom Layer w0.203: R4_XLR1.2@234.71,50.393 239.877,50.393 240.467,50.983 X1_XLR1.8@243.189,50.983 243.189,44.307 241.076,42.194 J43_XLR1.3@241.076,38.926
  Bottom Layer w0.254: R15_XLR1.1@219.44,51.491 220.329,51.491 221.427,50.393 C7_XLR1.2@222.662,50.393 222.947,50.393 223.892,51.338 233.832,51.338 234.412,50.758 234.412,50.691 R4_XLR1.2@234.71,50.393 234.71,49.539 233.632,48.461 C2_XLR1.1@233.632,48.361
XLR_B_XLR2: C2_XLR2.1 C7_XLR2.2 J43_XLR2.3 R4_XLR2.2 R15_XLR2.1 X1_XLR2.8 | length 40.8
  Bottom Layer w0.254: R15_XLR2.1@219.472,83.491 220.361,83.491 221.459,82.393 C7_XLR2.2@222.694,82.393 222.979,82.393 223.924,83.338 233.864,83.338 234.444,82.758 234.444,82.691 R4_XLR2.2@234.742,82.393 ; C2_XLR2.1@233.664,80.361 233.664,80.461 234.742,81.539 R4_XLR2.2@234.742,82.393 ; J43_XLR2.3@241.076,70.93 241.076,72.674 243.221,74.819 X1_XLR2.8@243.221,82.983 243.146,83.058 239.522,83.058 238.857,82.393 R4_XLR2.2@234.742,82.393
XLR_B_XLR3: C2_XLR3.1 C7_XLR3.2 J43_XLR3.3 R4_XLR3.2 R15_XLR3.1 X1_XLR3.8 | length 41.5
  Bottom Layer w0.254: R15_XLR3.1@219.44,115.491 220.329,115.491 221.427,114.393 C7_XLR3.2@222.662,114.393 222.947,114.393 223.892,115.338 233.832,115.338 234.412,114.758 234.412,114.691 R4_XLR3.2@234.71,114.393 ; C2_XLR3.1@233.632,112.361 233.632,112.461 234.71,113.539 R4_XLR3.2@234.71,114.393 ; J43_XLR3.3@241.076,102.426 241.076,104.678 243.316,106.918 X1_XLR3.8@243.316,115.106 240.582,115.106 239.869,114.393 R4_XLR3.2@234.71,114.393
XLR_B_XLR4: C2_XLR4.1 C7_XLR4.2 J43_XLR4.3 R4_XLR4.2 R15_XLR4.1 X1_XLR4.8 | length 40.7
  Bottom Layer w0.254: R15_XLR4.1@219.44,147.491 220.329,147.491 221.427,146.393 C7_XLR4.2@222.662,146.393 222.947,146.393 223.892,147.338 233.832,147.338 234.412,146.758 234.412,146.691 R4_XLR4.2@234.71,146.393 ; C2_XLR4.1@233.632,144.361 233.632,144.461 234.71,145.539 R4_XLR4.2@234.71,146.393 ; J43_XLR4.3@241.061,134.874 243.01,136.823 243.01,146.804 X1_XLR4.8@243.189,146.983 240.709,146.983 240.119,146.393 R4_XLR4.2@234.71,146.393
pads on no net: J1_XLR1.4 J1_XLR1.5 J1_XLR1.6 J1_XLR1.257 J1_XLR1.258 J1_XLR2.4 J1_XLR2.5 J1_XLR2.6 J1_XLR2.257 J1_XLR2.258 J1_XLR3.4 J1_XLR3.5 J1_XLR3.6 J1_XLR3.257 J1_XLR3.258 J1_XLR4.4 J1_XLR4.5 J1_XLR4.6 J1_XLR4.257 J1_XLR4.258 J2_XLR1.4 J2_XLR1.6 J2_XLR1.257 J2_XLR1.258 J2_XLR2.4 J2_XLR2.6 J2_XLR2.257 J2_XLR2.258 J2_XLR3.4 J2_XLR3.6 J2_XLR3.257 J2_XLR3.258 J2_XLR4.4 J2_XLR4.6 J2_XLR4.257 J2_XLR4.258 J3.4 J3.6 J3.257 J3.258 J29.4 J29.6 J29.257 J29.258 J30.4 J30.6 J30.257 J30.258 J31.4 J31.6 J31.257 J31.258 J32.4 J32.6 J32.257 J32.258 J38. J38.A5 J38.A6 J38.A7 J38.A8 J38.B5 J38.B6 J38.B7 J38.B8 J38.S1 J38.S2 J38.S3 J38.S4 J39.4 J39.5 J39.6 J39.257 J39.258 J40.4 J40.5 J40.6 J40.257 J40.258 J41.4 J41.5 J41.6 J41.257 J41.258 J43_XLR1. J43_XLR1.G J43_XLR1.GS J43_XLR1.RS J43_XLR1.SS J43_XLR1.TS J43_XLR2. J43_XLR2.G J43_XLR2.GS J43_XLR2.RS J43_XLR2.SS J43_XLR2.TS J43_XLR3. J43_XLR3.G J43_XLR3.GS J43_XLR3.RS J43_XLR3.SS J43_XLR3.TS J43_XLR4. J43_XLR4.G J43_XLR4.GS J43_XLR4.RS J43_XLR4.SS J43_XLR4.TS J45.4 J45.5 J45.6 J45.257 J45.258 MH10.0 MH11.0 MH12.0 MH13.0 PS1.4 R1_1.1 R1_1.2 R2_1.1 R2_1.2 R3_1.1 R3_1.2 R4_1.1 R4_1.2 SW1.1 SW1.2 SW1.3 SW1.4 SW1.5 SW1.6 SW2.1 SW2.2 SW2.3 SW2.4 SW2.5 SW2.6 SW3.1 SW3.2 SW3.3 SW3.4 SW3.5 SW3.6 SW4.1 SW4.2 SW4.3 SW4.4 SW4.5 SW4.6 SW5.1 SW5.2 SW5.3 SW5.4 SW5.5 SW5.6 SW5.7 SW5.8 SW6.1 SW6.2 SW6.3 SW6.4 SW6.5 SW6.6 SW6.7 SW6.8 SW7.1 SW7.2 SW7.3 SW7.4 SW7.5 SW7.6 SW7.7 SW7.8 SW8.1 SW8.2 SW8.3 SW8.4 SW8.5 SW8.6 SW8.7 SW8.8 SW9.1 SW9.2 SW9.3 SW9.4 SW9.5 SW9.6 U1.9 U1.10 U1.17 U1.18 U2.9 U2.10 U2.17 U2.18 U3.2 U3.9 U3.10 U3.17 U3.18 U4.36 U4.40 U5.36 U5.40 X1. X1.2 X1.4 X1.6 X1.7 X1.11 X1.12 X1.13 X1.14 X1.15 X1.18 X1_1.1 X1_1.2 X1_1.3 X1_1.4 X1_1.5 X1_1.6 X1_1.7 X1_1.8 X2. X2.4 X2.5 X2.6 X2.10 X2.12 X2.13 X2.15 X2_1.1 X2_1.2 X2_1.3 X2_1.4 X2_1.5 X2_1.6 X2_1.7 X2_1.8 X3. X3.2 X3.3 X3.4 X3.5 X3.7 X3.11 X3.12 X3.14 X3.17 X3_1.1 X3_1.2 X3_1.3 X3_1.4 X3_1.5 X3_1.6 X3_1.7 X3_1.8 X4. X4.1 X4.4 X4.6 X4.7 X4.9 X4.10 X4.11 X4.12 X4.13 X4.14 X4.16 X4.19 X4.20 X4_1.1 X4_1.2 X4_1.3 X4_1.4 X4_1.5 X4_1.6 X4_1.7 X4_1.8 X5. X5.1 X5.2 X5.4 X6. X6.1 X6.3 X7. X7.5 X7.7 X7.8 X7.11 X7.12 X7.13 X7.14 X7.15 X7.16 X7.17 X7.18 X7.19 X7.20 X8. X8.1 X8.7 X8.11 X8.12 X8.13 X8.14 X8.15 X8.16 X8.17 X8.18 X8.19 X8.20
copper on no net: | length 589.8
  Top Layer w0.203: 40.6,45.704 40.6,46.004 42.885,46.852 cw(c43.2,46.004) 44.097,46.126 45.599,35.086 ccw(c47.246,35.31) 45.611,35.011 46.061,32.554 ccw(c47.246,32.77) 46.185,32.199 47.246,30.23 ; 40.6,77.704 40.6,78.004 42.885,78.852 cw(c43.2,78.004) 44.097,78.126 45.599,67.086 ccw(c47.246,67.31) 45.611,67.011 46.061,64.554 ccw(c47.246,64.77) 46.185,64.199 47.246,62.23 ; 40.6,109.704 40.6,110.004 42.885,110.852 cw(c43.2,110.004) 44.097,110.126 45.599,99.086 ccw(c47.246,99.31) 45.611,99.011 46.061,96.554 ccw(c47.246,96.77) 46.185,96.199 47.246,94.23 ; 40.6,141.704 40.6,142.004 42.885,142.852 cw(c43.2,142.004) 44.097,142.126 45.599,131.086 ccw(c47.246,131.31) 45.611,131.011 46.061,128.554 ccw(c47.246,128.77) 46.185,128.199 47.246,126.23 ; 43.2,45.404 43.2,45.704 ; 137.729,43.029 137.773,43.029 137.778,43.034 137.905,43.034
  Top Layer w0.254: 43.09,30.183 44.1,27.004 45.3,24.654 ; 44.1,20.304 45.3,22.654 46.99,24.13 ; 46.6,54.204 45.429,51.98 ccw(c45.654,51.861) 45.4,51.865 45.4,51.854 46.017,35.264 ccw(c47.246,35.31) 46.17,34.714 47.246,32.77 ; 46.6,56.204 47.515,54.8 cw(c46.6,54.204) 47.692,54.204 47.692,52.073 47.84,51.8 ; 46.6,86.204 45.429,83.98 ccw(c45.654,83.861) 45.4,83.865 45.4,83.854 46.017,67.264 ccw(c47.246,67.31) 46.17,66.714 47.246,64.77 ; 46.6,88.204 47.515,86.8 cw(c46.6,86.204) 47.692,86.204 47.692,84.073 47.84,83.8 ; 46.6,118.204 45.429,115.98 ccw(c45.654,115.861) 45.4,115.865 45.4,115.854 46.017,99.264 ccw(c47.246,99.31) 46.17,98.714 47.246,96.77 ; 46.6,120.204 47.515,118.8 cw(c46.6,118.204) 47.692,118.204 47.692,116.073 47.84,115.8 ; 46.6,150.204 45.429,147.98 ccw(c45.654,147.862) 45.4,147.865 45.4,147.854 46.017,131.264 ccw(c47.246,131.31) 46.17,130.714 47.246,128.77 ; 46.6,152.204 47.515,150.8 cw(c46.6,150.204) 47.692,150.204 47.692,148.073 47.84,147.8 ; 46.99,99.314 49.473,108.077 ; 47.117,27.432 46.99,24.13 ; 47.117,91.44 51.562,87.63 ; 47.244,123.444 51.308,120.777 51.308,112.522 51.816,100.838 52.07,96.52 51.562,87.63 ; 47.246,59.69 48.387,57.404 48.768,57.023 50.673,57.023 ; 47.246,67.31 49.276,76.2 ; 47.371,35.56 49.53,44.323 ; 47.625,131.318 49.657,139.954 ; 142.477,77.451 142.604,77.451 ; 144.001,77.451 144.128,77.451 ; 46.99,24.13 51.435,25.4 51.816,27.051 51.943,34.671 51.562,41.021 51.562,56.134 50.673,57.023 ; 50.673,57.023 51.689,59.944 52.07,65.913 51.816,69.342 51.689,76.962 51.562,87.63
  Bottom Layer w0.203: 40.6,41.704 40.6,41.404 50.338,36.381 cw(c49.786,35.31) 50.991,35.31 50.991,32.77 cw(c49.786,32.77) 50.847,32.199 49.786,30.23 ; 40.6,73.704 40.6,73.404 50.338,68.381 cw(c49.786,67.31) 50.991,67.31 50.991,64.77 cw(c49.786,64.77) 50.847,64.199 49.786,62.23 ; 40.6,105.704 40.6,105.404 50.338,100.381 cw(c49.786,99.31) 50.991,99.31 50.991,96.77 cw(c49.786,96.77) 50.847,96.199 49.786,94.23 ; 40.6,137.704 40.6,137.404 50.338,132.381 cw(c49.786,131.31) 50.991,131.31 50.991,128.77 cw(c49.786,128.77) 50.847,128.199 49.786,126.23 ; 65.416,112.205 65.66,111.961 ; 129.16,109.396 129.349,109.585
  Bottom Layer w0.254: 40.6,37.704 40.6,37.404 46.397,31.879 ccw(c47.246,32.77) 47.842,31.694 49.786,32.77 ; 40.6,69.704 40.6,69.404 46.397,63.879 ccw(c47.246,64.77) 47.842,63.694 49.786,64.77 ; 40.6,101.704 40.6,101.404 46.397,95.879 ccw(c47.246,96.77) 47.842,95.694 49.786,96.77 ; 40.6,133.704 40.6,133.404 46.397,127.879 ccw(c47.246,128.77) 47.842,127.694 49.786,128.77 ; 43.2,37.704 43.2,37.404 46.407,34.411 ccw(c47.246,35.31) 47.842,34.234 49.786,35.31 ; 43.2,41.704 43.2,41.404 50.66,36.694 cw(c49.786,35.31) 51.423,35.31 51.423,32.77 cw(c49.786,32.77) 51.402,32.508 51,30.033 cw(c49.786,30.23) 50.85,29.613 50.183,28.463 49.786,27.69 ; 43.2,69.704 43.2,69.404 46.407,66.411 ccw(c47.246,67.31) 47.842,66.234 49.786,67.31 ; 43.2,73.704 43.2,73.404 50.66,68.694 cw(c49.786,67.31) 51.423,67.31 51.423,64.77 cw(c49.786,64.77) 51.402,64.508 51,62.033 cw(c49.786,62.23) 50.85,61.613 50.183,60.463 49.786,59.69 ; 43.2,101.704 43.2,101.404 46.407,98.411 ccw(c47.246,99.31) 47.842,98.234 49.786,99.31 ; 43.2,105.704 43.2,105.404 50.66,100.694 cw(c49.786,99.31) 51.423,99.31 51.423,96.77 cw(c49.786,96.77) 51.402,96.508 51,94.033 cw(c49.786,94.23) 50.85,93.613 50.183,92.463 49.786,91.69 ; 43.2,133.704 43.2,133.404 46.407,130.411 ccw(c47.246,131.31) 47.842,130.234 49.786,131.31 ; 43.2,137.704 43.2,137.404 50.66,132.694 cw(c49.786,131.31) 51.423,131.31 51.423,128.77 cw(c49.786,128.77) 51.402,128.508 51,126.033 cw(c49.786,126.23) 50.85,125.613 50.183,124.463 49.786,123.69
  Bottom Layer w0.635: 142.477,77.451 144.001,77.451 ; 142.511,65.986 143.966,65.986 144.001,66.021

## Polygon pours and split planes (outlines as drawn)
GND_MCU on Top Layer "NONET_L02_P-001" (solid, remove dead copper, pour order 37): 54,155.956 54,11.684 135.001,11.684 135.001,155.956 127.508,155.956
GND_A on Top Layer "NONET_L02_P-001" (solid, remove dead copper, pour order 8): 259.588,156 211.8,156 211.8,11.684 259.588,11.684
GND_A on Top Layer "NONET_L02_P-001" (solid, remove dead copper, pour order 31): 148.573,11.985 148.573,25.254 157.336,34.017 166.099,34.017 178.926,46.844 178.926,115.932 173.338,121.52 135.984,121.52 135.984,156 148.217,156.022 148.217,138.219 157.336,129.1 211.5,129.1 211.5,12.187
GND_A on Top Layer "NONET_L02_P-001" (solid, remove dead copper, pour order 30): 35.102,11.684 35.102,155.956 53.517,155.956 53.517,11.684
no net on Top Layer "NONET_L02_P-001" (solid, remove dead copper, pour order 21): 145.225,11.684 135.873,11.684 135.873,121.266 144.825,121.266
GND on Top Layer "NONET_L02_P-001" (solid, remove dead copper, pour order 32): 157.336,129.1 211.7,129.1 211.7,156 148.5,156 148.5,137.9 154.1,132.3
GND on Top Layer "NONET_L02_P-001" (solid, remove dead copper, pour order 16): 148.702,23.732 148.702,121.191 156.605,121.191 156.707,129.772 164.931,129.8 178.703,116.028 178.703,46.874 165.972,34.144 159.114,34.144
GND_MCU on Bottom Layer "NONET_L02_P-001" (solid, remove dead copper, pour order 36): 54,155.956 54,11.684 135.001,11.684 135.001,155.956 127.508,155.956
GND_A on Bottom Layer "NONET_L02_P-001" (solid, remove dead copper, pour order 9): 259.588,156 211.9,156 211.9,11.684 259.588,11.684
GND_A on Bottom Layer "NONET_L02_P-001" (solid, remove dead copper, pour order 18): 148.573,11.985 148.573,25.254 157.336,34.017 166.099,34.017 178.926,46.844 178.926,115.932 173.338,121.52 135.984,121.52 135.984,156 148.217,156.022 148.217,138.219 157.336,129.1 211.45,129.1 211.55,12.187
+5V_Out on Bottom Layer "NONET_L02_P-001" (solid, remove dead copper, pour order 20): 145.335,16.872 135.873,16.872 135.873,121.266 144.954,121.266
GND_A on Bottom Layer "NONET_L02_P-001" (solid, remove dead copper, pour order 29): 35.102,11.684 35.102,155.956 53.517,155.956 53.517,11.684
GND on Bottom Layer "NONET_L02_P-001" (solid, remove dead copper, pour order 17): 148.7,23.73 148.7,121.139 173.592,121.139 178.703,116.028 178.703,46.874 165.972,34.144 159.114,34.144
GND_MCU on Mid-Layer 1 "NONET_L02_P-001" (solid, remove dead copper, pour order 41): 54,156.083 131.064,156.083 131.064,11.557 54,11.557
GND_MCU on Mid-Layer 1 "NONET_L02_P-001" (solid, remove dead copper, pour order 38): 123.19,90.805 146.685,90.805 146.685,30.988 123.19,30.988 123.19,88.392
GND_MCU on Mid-Layer 1 "NONET_L02_P-001" (solid, remove dead copper, pour order 39): 119.888,155.956 119.888,112.268 133.35,112.268 133.35,140.081 153.289,140.081 153.289,136.271 191.135,136.271 191.135,156.083
GND_A on Mid-Layer 1 "NONET_L02_P-001" (solid, remove dead copper, pour order 35): 259.588,156 211.8,156 211.8,11.684 259.588,11.684
+48V_Enabled on Mid-Layer 1 "NONET_L02_P-001" (solid, remove dead copper, pour order 34): 238.379,153.162 242.018,149.523 246.424,149.523 247.777,150.876 247.777,156.083 214.122,156.083 214.122,153.162
GND on Mid-Layer 2 "NONET_L02_P-001" (solid, pour order 33): 136.5,156 136.5,11.684 178.7,11.684 178.7,156

## Silkscreen, mask and mechanical layers (free items; w line width, h text height)
Top Overlay:
  circle w0.381: c249.886,152.11 r2.236
  circle w0.381: c249.918,120.11 r2.236
  circle w0.381: c250.013,87.987 r2.236
  circle w0.381: c249.886,56.11 r2.236
  lines w0.127: 109.728,145.923 111.506,145.923 111.506,148.082 120.269,148.082 ; 145.796,142.494 148.463,144.272 ; 40.757,30.134 41.549,31.804 43.089,32.419 44.694,31.785 45.324,30.266 44.694,28.61 43.17,27.975 41.549,28.562 40.757,30.134 ; 40.757,62.134 41.549,60.562 43.17,59.975 44.694,60.61 45.324,62.266 44.694,63.785 43.089,64.419 41.549,63.804 40.757,62.134 ; 40.757,94.134 41.549,92.562 43.17,91.975 44.694,92.61 45.324,94.266 44.694,95.785 43.089,96.419 41.549,95.804 40.757,94.134 ; 40.757,126.134 41.549,124.562 43.17,123.975 44.694,124.61 45.324,126.266 44.694,127.785 43.089,128.419 41.549,127.804 40.757,126.134
  text "+48" at 254,151.892 h0.76
  text "5v_48" at 209.55,149.225 h0.76
  text "MCU5V -> 5V_dcdc" at 120.523,147.574 h0.76
  text "USB -> 5V (to dcdc)" at 95.377,145.542 h0.76
  text "5V_dcdc" at 140.081,141.859 h0.76
  text "VCC++" at 191.516,134.874 h0.76 r90
  text "VCC--" at 168.275,134.239 h0.76 r90
  text "+48V" at 197.231,131.445 h0.76 r90
Bottom Overlay:
  circle w0.381: c43.09,126.183 r2.236
  circle w0.381: c43.09,94.183 r2.236
  circle w0.381: c43.09,62.183 r2.236
  circle w0.381: c43.09,30.183 r2.236
  lines w0.127: 247.652,56.193 248.281,54.537 249.805,53.902 251.426,54.489 252.218,56.061 251.426,57.73 249.886,58.346 248.281,57.712 247.652,56.193 ; 247.652,152.193 248.281,150.537 249.805,149.902 251.426,150.489 252.218,152.061 251.426,153.73 249.886,154.346 248.281,153.712 247.652,152.193 ; 247.684,120.193 248.313,118.537 249.837,117.902 251.458,118.489 252.25,120.061 251.458,121.73 249.918,122.346 248.313,121.712 247.684,120.193 ; 247.779,88.07 248.408,86.414 249.932,85.779 251.553,86.366 252.345,87.938 251.553,89.607 250.013,90.223 248.408,89.589 247.779,88.07
  text "3V3_CODEC" at 143.383,95.25 h0.58
  text "3V3_D" at 148.209,81.28 h0.58
Board:
  lines w0.254: 38.859,153.542 41.28,155.963 ; 38.9,153.579 38.9,20.104 47.32,11.684 52,11.684 53,11.684 53,12.084 53,15.084 cw(c53.5,15.084) 54,15.084 54,12.084 54,11.684 55,11.684 259.588,11.684 259.588,156 55,156 54,156 ; 41.321,156 52,156 53,156 53,152.6 ccw(c53.5,152.6) 54,152.6 54,156 ; 54,28.184 54,34.2 ccw(c53.5,34.2) 53,34.2 53,28.784 53,27.584 53,24.884 ccw(c53.5,24.884) 54,24.884 54,27.584 54,28.784 ; 209.28,156 214.919,156 ; 54,156 54,156 ; 53,43.9 ccw(c53.5,43.9) 54,43.9 54,46.6 54,50.5 54,53.2 ccw(c53.5,53.2) 53,53.2 53,50.5 53,46.6 53,43.9 ; 53,62.9 ccw(c53.5,62.9) 54,62.9 54,65.6 54,69.5 54,72.2 ccw(c53.5,72.2) 53,72.2 53,69.5 53,65.6 53,62.9 ; 53,81.9 ccw(c53.5,81.9) 54,81.9 54,84.6 54,88.5 54,91.2 ccw(c53.5,91.2) 53,91.2 53,88.5 53,84.6 53,81.9 ; 53,100.9 ccw(c53.5,100.9) 54,100.9 54,103.6 54,107.4 54,110.1 ccw(c53.5,110.1) 53,110.1 53,107.4 53,103.6 53,100.9 ; 53,119.9 ccw(c53.5,119.9) 54,119.9 54,122.6 54,126.4 54,129.1 ccw(c53.5,129.1) 53,129.1 53,126.4 53,122.6 53,119.9 ; 53,138.877 ccw(c53.5,138.877) 54,138.877 54,141.577 54,142.777 54,145.991 ccw(c53.5,145.991) 53,145.991 53,142.777 53,141.577 53,138.877
Mechanical 15:
  lines w0.254: 248.844,63.018 258.194,63.018 258.194,49.518 258.169,49.493 248.919,49.493 248.919,62.943 248.844,63.018 ; 248.844,95.043 258.194,95.043 258.194,81.543 258.169,81.518 248.919,81.518 248.919,94.968 248.844,95.043 ; 248.869,127.043 258.219,127.043 258.219,113.543 258.194,113.518 248.944,113.518 248.944,126.968 248.869,127.043 ; 248.894,159.043 248.969,158.968 248.969,145.518 258.219,145.518 258.244,145.543 258.244,159.043 248.894,159.043